# Altium PCB MGMEZZ02.PCBDOC (part 2 of 5)
Units mil, origin at the board's own origin, x right, y up, seen from the top; angles counter-clockwise.
Board outline 5705.83 x 3625.73 mil, 6 copper layers (Top Layer, Internal Plane 1, Mid-Layer 1, Mid-Layer 2, Internal Plane 2, Bottom Layer); 570 components, 354 nets, 2192 pads, 728 vias.
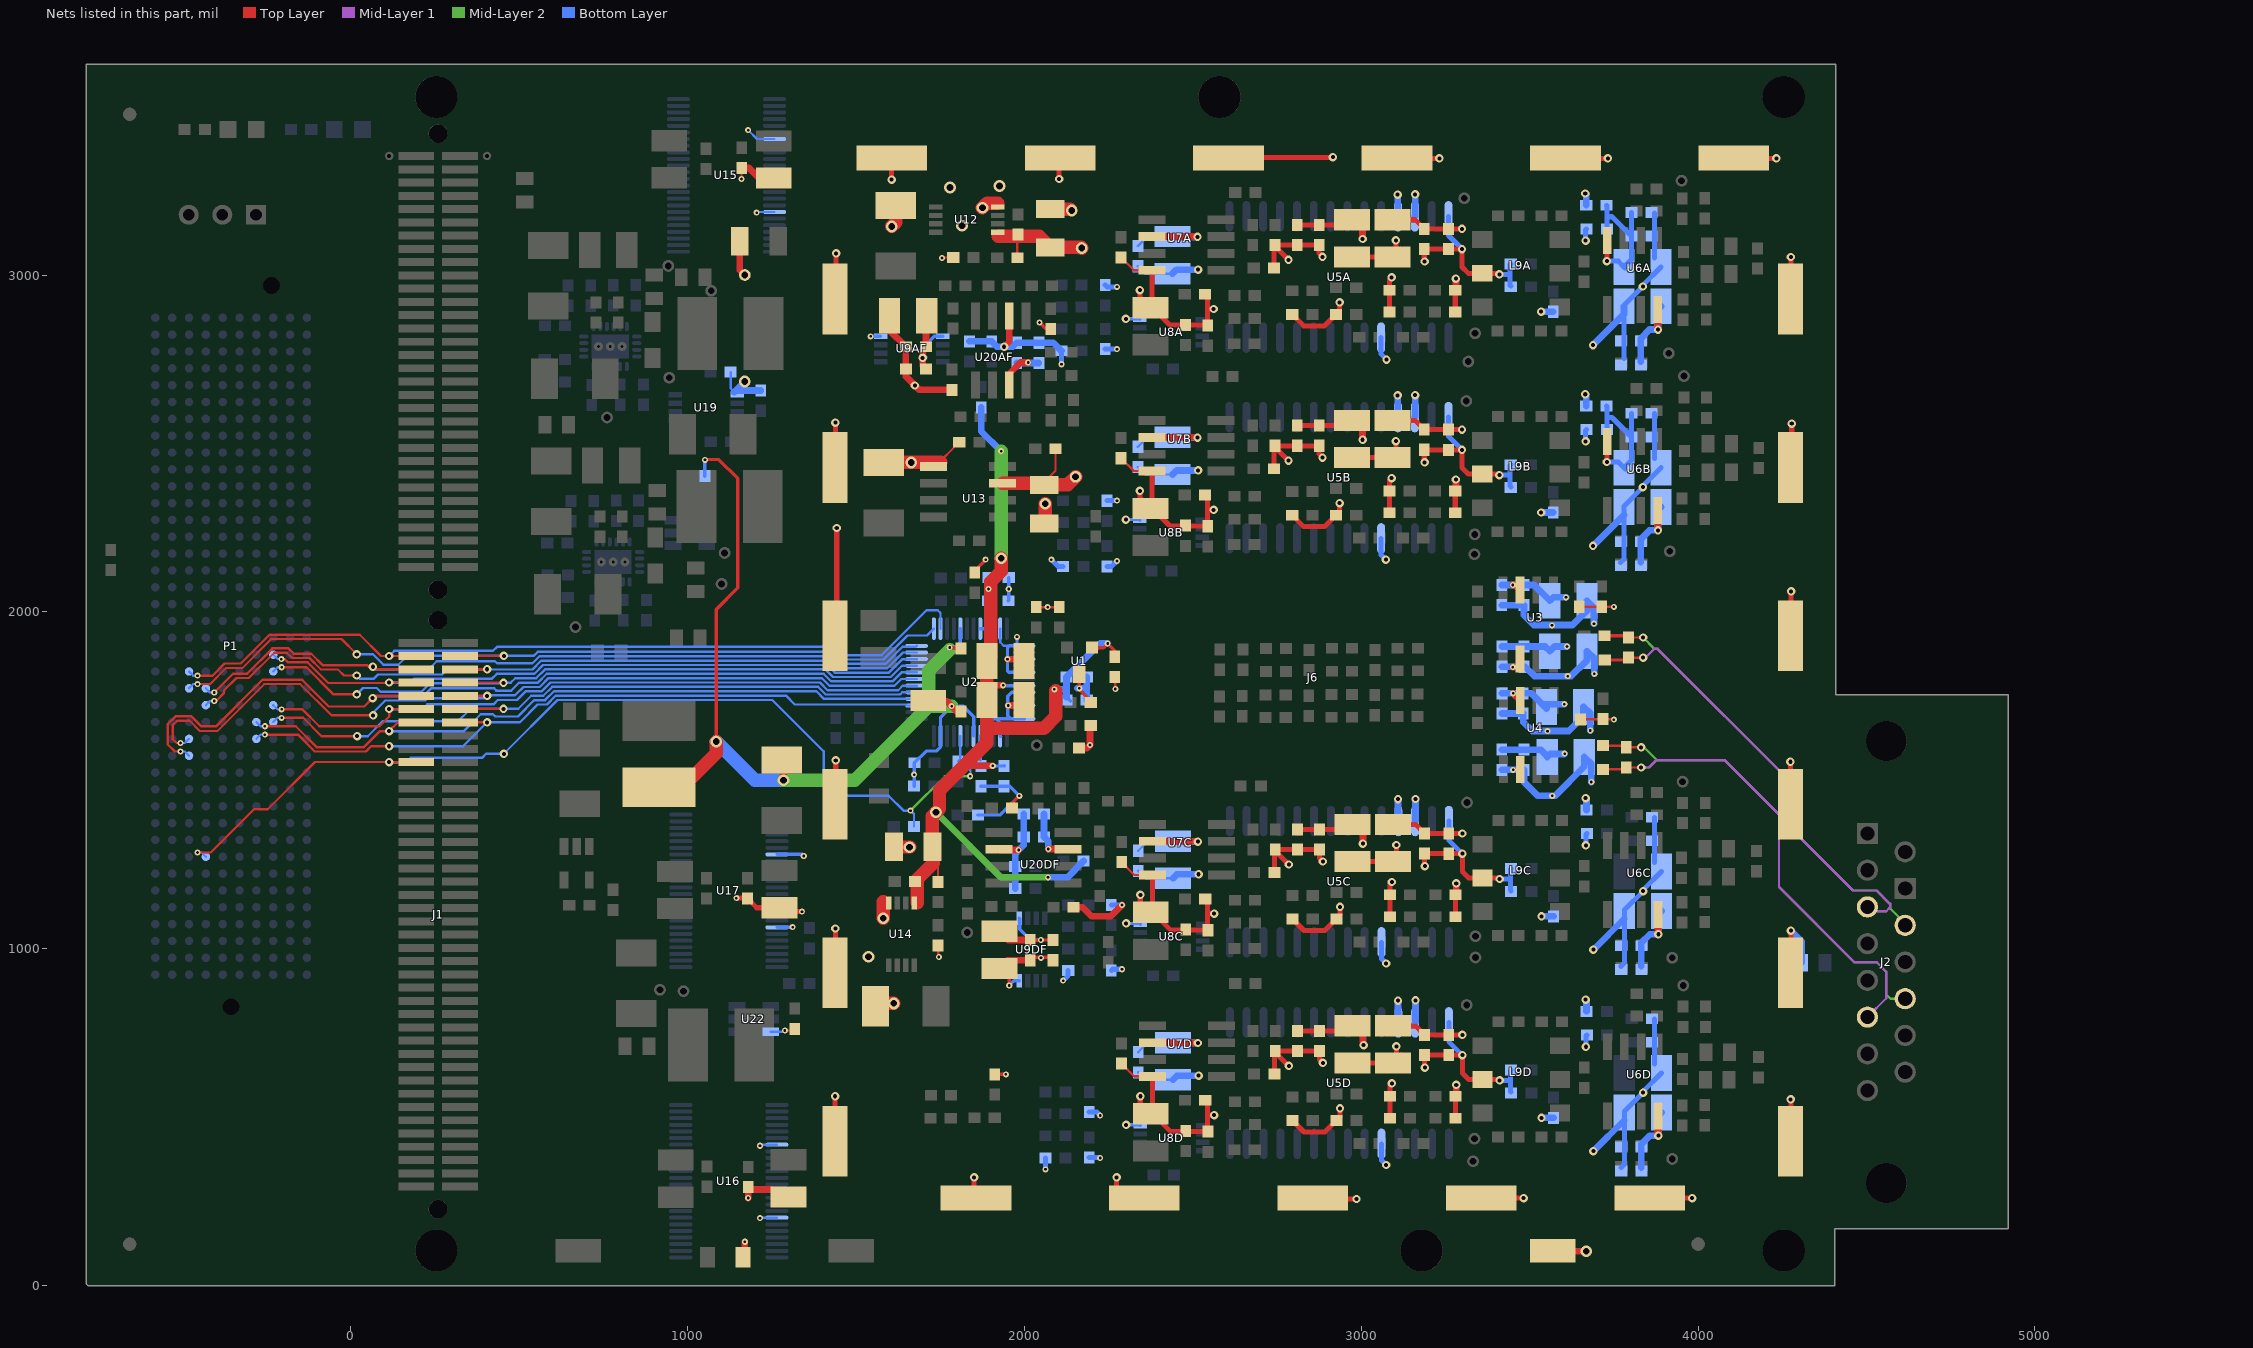
[diagram p6: the nets of this part, all layers, seen from the top]

## Footprints (in the part's own frame and the unit in brackets; to place one, negate y for a bottom-side part, rotate by r counter-clockwise, add the part's x,y. Pads: shape width x height; smd on the part's side, far side on the other; paste and mask are expansions set on the pad) (continued)
CON_AMP_1MM_64PINS [mil]
  rect 23.6x106.3 smd: 1(-0.4,0.18) 2(-0.4,-129.73) 3(-39.77,0.18) 4(-39.77,-129.73) 5(-79.13,0.18) 6(-79.13,-129.73) 7(-118.5,0.18) 8(-118.5,-129.73) 9(-157.87,0.18) 10(-157.87,-129.73) 11(-197.23,0.18) 12(-197.23,-129.73) 13(-236.6,0.18) 14(-236.6,-129.73) 15(-275.97,0.18) 16(-275.97,-129.73) 17(-315.33,0.18) 18(-315.33,-129.73) 19(-354.7,0.18) 20(-354.7,-129.73) 21(-394.07,0.18) 22(-394.07,-129.73) 23(-433.43,0.18) 24(-433.43,-129.73) 25(-472.8,0.18) 26(-472.8,-129.73) 27(-512.17,0.18) 28(-512.17,-129.73) 29(-551.53,0.18) 30(-551.53,-129.73) 31(-590.9,0.18) 32(-590.9,-129.73) 33(-630.27,0.18) 34(-630.27,-129.73) 35(-669.63,0.18) 36(-669.63,-129.73) 37(-709,0.18) 38(-709,-129.73) 39(-748.37,0.18) 40(-748.37,-129.73) 41(-787.73,0.18) 42(-787.73,-129.73) 43(-827.1,0.18) 44(-827.1,-129.73) 45(-866.47,0.18) 46(-866.47,-129.73) 47(-905.83,0.18) 48(-905.83,-129.73) 49(-945.2,0.18) 50(-945.2,-129.73) 51(-984.57,0.18) 52(-984.57,-129.73) 53(-1023.93,0.18) 54(-1023.93,-129.73) 55(-1063.3,0.18) 56(-1063.3,-129.73) 57(-1102.67,0.18) 58(-1102.67,-129.73) 59(-1142.03,0.18) 60(-1142.03,-129.73) 61(-1181.4,0.18) 62(-1181.4,-129.73) 63(-1220.77,0.18) 64(-1220.77,-129.73)
  round 56 hole 55 unplated: HOLE1(-1287.8,-64.72) HOLE2(66.52,-64.77)
  silkscreen extent -1320,-198 98,71
CON_AMP_1MM_84PINS [mil]
  rect 23.6x106.3 smd: 1(-0.4,0.12) 2(-0.4,-129.8) 3(-39.77,0.12) 4(-39.77,-129.8) 5(-79.13,0.12) 6(-79.13,-129.8) 7(-118.5,0.12) 8(-118.5,-129.8) 9(-157.87,0.12) 10(-157.87,-129.8) 11(-197.23,0.12) 12(-197.23,-129.8) 13(-236.6,0.12) 14(-236.6,-129.8) 15(-275.97,0.12) 16(-275.97,-129.8) 17(-315.33,0.12) 18(-315.33,-129.8) 19(-354.7,0.12) 20(-354.7,-129.8) 21(-394.07,0.12) 22(-394.07,-129.8) 23(-433.43,0.12) 24(-433.43,-129.8) 25(-472.8,0.12) 26(-472.8,-129.8) 27(-512.17,0.12) 28(-512.17,-129.8) 29(-551.53,0.12) 30(-551.53,-129.8) 31(-590.9,0.12) 32(-590.9,-129.8) 33(-630.27,0.12) 34(-630.27,-129.8) 35(-669.63,0.12) 36(-669.63,-129.8) 37(-709,0.12) 38(-709,-129.8) 39(-748.37,0.12) 40(-748.37,-129.8) 41(-787.73,0.12) 42(-787.73,-129.8) 43(-827.1,0.12) 44(-827.1,-129.8) 45(-866.47,0.12) 46(-866.47,-129.8) 47(-905.83,0.12) 48(-905.83,-129.8) 49(-945.2,0.12) 50(-945.2,-129.8) 51(-984.57,0.12) 52(-984.57,-129.8) 53(-1023.93,0.12) 54(-1023.93,-129.8) 55(-1063.3,0.12) 56(-1063.3,-129.8) 57(-1102.67,0.12) 58(-1102.67,-129.8) 59(-1142.03,0.12) 60(-1142.03,-129.8) 61(-1181.4,0.12) 62(-1181.4,-129.8) 63(-1220.77,0.12) 64(-1220.77,-129.8) 65(-1260.13,0.12) 66(-1260.13,-129.8) 67(-1299.5,0.12) 68(-1299.5,-129.8) 69(-1338.87,0.12) 70(-1338.87,-129.8) 71(-1378.23,0.12) 72(-1378.23,-129.8) 73(-1417.6,0.12) 74(-1417.6,-129.8) 75(-1456.97,0.12) 76(-1456.97,-129.8) 77(-1496.33,0.12) 78(-1496.33,-129.8) 79(-1535.7,0.12) 80(-1535.7,-129.8) 81(-1575.07,0.12) 82(-1575.07,-129.8) 83(-1614.43,0.12) 84(-1614.43,-129.8)
  round 56 hole 55 unplated: HOLE1(-1681.5,-64.83) HOLE2(66.52,-64.83)
  silkscreen extent -1711,-199 98,71
DSUB/RS.318/TM/15 [mil]
  rect 63x63 hole 42: 1(0.47,0.25) 10(163.97,112.25)
  round 63 hole 42: 2(109.47,0.25) 3(218.47,0.25) 4(327.47,0.25) 5(436.47,0.25) 6(545.47,0.25) 7(654.47,0.25) 8(763.47,0.25) 9(54.97,112.25) 11(272.97,112.25) 12(381.97,112.25) 13(490.97,112.25) 14(599.97,112.25) 15(708.97,112.25)
  round 120 hole 120: Hole29(1037.97,56.25) Hole30(-274.03,56.25)
  silkscreen extent -406,-75 1169,662
Fiducial_mark [mil]
  round 40 smd paste-20 mask+20: 0(0,0)
  round 40 smd far side paste-20 mask+20: 1(0,0)
GroundClip [mil] "GroundClipPoint"
  rect 135x70 smd: 1(0,0)
  silkscreen extent -75,-42 75,43, body extent -68,-35 68,35, height 60
HDR1X3_MolexVertical [mm]
  rect 1.5x1.5 hole 0.889: 1(0,0)
  round 1.5 hole 0.889: 2(2.54,0) 3(5.08,0)
  silkscreen extent -2.54,-3.02 7.62,1.73
IHLP-1212 [mm] "Inductor"
  rect 1.5x1.2 smd: 1(-1.35,0) 2(1.35,0)
  round 0.2 on Top Overlay: 2(-2.032,0.889)
  silkscreen extent -1.8,-1.6 1.8,1.6, body extent -1.91,-1.65 1.91,1.65, height 2
LTC3626 [mm] "QFN, 20-Leads, Body 4.1x3.1mm (max), Pitch 0.50mm, IPC Medium Density"
  oval 0.7x0.3 smd: 1(-1.5,1.25) 2(-1.5,0.75) 3(-1.5,0.25) 4(-1.5,-0.25) 5(-1.5,-0.75) 6(-1.5,-1.25) 11(1.5,-1.25) 12(1.5,-0.75) 13(1.5,-0.25) 14(1.5,0.25) 15(1.5,0.75) 16(1.5,1.25)
  oval 0.3x0.7 smd: 7(-0.75,-2) 8(-0.25,-2) 9(0.25,-2) 10(0.75,-2) 17(0.75,2) 18(0.25,2) 19(-0.25,2) 20(-0.75,2)
  round 0.66 hole 0.203: 21(0,0) 21(0,-0.889) 21(0,0.889)
  rect 1.8x2.8 smd: 21(0,0)
  silkscreen extent -1.83,-2.05 1.55,2.05, body extent -1.55,-2.05 1.55,2.05, height 0.8
MSOP-8 [mil]
  rect 40x16 smd: 1(0,0) 2(0,-25) 3(0,-50) 4(0,-75) 5(185,-75) 6(185,-50) 7(185,-25) 8(185,0)
  silkscreen extent -3,-100 150,26
MTHOLE.125 [mil]
  round 125 hole 125 unplated: 1(-0.4,-0.25)
PWB [mil] "Transformer - Coilcraft"
  round 10 on Top Overlay: 1(-44,-3)
  rect 50x60 smd: 1(0,0) 2(100,0) 3(200,0) 4(200,230) 5(100,230) 6(0,230)
  silkscreen extent -35,-35 235,267
"SHIELD 2.75X3.00" [mil]
  rect 210x75 smd: 1(380.2,37) 2(880.2,37) 3(1380.2,37) 4(1880.2,37) 5(2380.2,37) 6(2880.2,37) 12(2880.2,-2800) 13(2380.2,-2800) 14(1880.2,-2800) 15(1380.2,-2800) 16(880.2,-2800) 17(380.2,-2800)
  rect 75x210 smd: 7(3048.7,-381.5) 8(3048.7,-881.5) 9(3048.7,-1381.5) 10(3048.7,-1881.5) 11(3048.7,-2381.5) 18(-38.3,-2631.5) 19(-38.3,-2131.5) 20(-38.3,-1631.5) 21(-38.3,-1131.5) 22(-38.3,-631.5) 23(-38.3,-131.5)
SO8 [mil]
  round 10 on Top Overlay: 0(-40,40)
  rect 80x26 smd: 1(0,0) 2(0,-50) 3(0,-100) 4(0,-150) 5(205,-150) 6(205,-100) 7(205,-50) 8(205,0)
  silkscreen extent -53,-180 258,30
"SOIC 28 300mils" [mm] "SOIC, 28-Leads, Body 18.1x7.6mm (max), Pitch 1.27mm, IPC Medium Density"
  oval 2.3x0.6 smd: 1(-4.575,8.255) 2(-4.575,6.985) 3(-4.575,5.715) 4(-4.575,4.445) 5(-4.575,3.175) 6(-4.575,1.905) 7(-4.575,0.635) 8(-4.575,-0.635) 9(-4.575,-1.905) 10(-4.575,-3.175) 11(-4.575,-4.445) 12(-4.575,-5.715) 13(-4.575,-6.985) 14(-4.575,-8.255) 15(4.575,-8.255) 16(4.575,-6.985) 17(4.575,-5.715) 18(4.575,-4.445) 19(4.575,-3.175) 20(4.575,-1.905) 21(4.575,-0.635) 22(4.575,0.635) 23(4.575,1.905) 24(4.575,3.175) 25(4.575,4.445) 26(4.575,5.715) 27(4.575,6.985) 28(4.575,8.255)
  silkscreen extent -4.7,-9.05 3.03,9.23, body extent -3.8,-9.05 3.8,9.05, height 2.65
SOT23 [mil]
  rect 36x36 smd: 1(-38,-80) 2(37,-80)
  rect 36x50 smd: 3(0,0)
  silkscreen extent -58,-85 57,5
SOT23-5 [mil]
  rect 26x50 smd: 1(-37.5,0) 2(0,0) 3(37.5,0) 4(37.5,100) 5(-37.5,100)
  silkscreen extent -83,-8 65,100
SOT23-6 [mil]
  rect 26x50 smd: 1(-37.5,0) 2(0,0) 3(37.5,0) 4(37.5,100) 5(0,100) 6(-37.5,100)
  silkscreen extent -83,-8 65,100
TANT4532 [mil]
  rect 80x120 smd: 1(-0.4,0.12) 2(179.6,0.12)
  silkscreen extent -83,-67 228,102
TCASE-A [mm]
  rect 1.35x2.15 smd: 1(0,0) 2(2.9,0)
  silkscreen extent -1.61,-1.4 4.49,1.4
TP-3520-SK [mil]
  round 35 hole 20: 1(0,0)
  silkscreen extent -27,-27 28,27
TSQFP50P900X900X160-48N [mm] "TSQFP, 48-Leads, Body 9.1x9.1mm (max), Pitch 0.50mm, IPC Medium Density"
  oval 1.7x0.3 smd: 1(-4.05,2.75) 2(-4.05,2.25) 3(-4.05,1.75) 4(-4.05,1.25) 5(-4.05,0.75) 6(-4.05,0.25) 7(-4.05,-0.25) 8(-4.05,-0.75) 9(-4.05,-1.25) 10(-4.05,-1.75) 11(-4.05,-2.25) 12(-4.05,-2.75) 25(4.05,-2.75) 26(4.05,-2.25) 27(4.05,-1.75) 28(4.05,-1.25) 29(4.05,-0.75) 30(4.05,-0.25) 31(4.05,0.25) 32(4.05,0.75) 33(4.05,1.25) 34(4.05,1.75) 35(4.05,2.25) 36(4.05,2.75)
  oval 0.3x1.7 smd: 13(-2.75,-4.05) 14(-2.25,-4.05) 15(-1.75,-4.05) 16(-1.25,-4.05) 17(-0.75,-4.05) 18(-0.25,-4.05) 19(0.25,-4.05) 20(0.75,-4.05) 21(1.25,-4.05) 22(1.75,-4.05) 23(2.25,-4.05) 24(2.75,-4.05) 37(2.75,4.05) 38(2.25,4.05) 39(1.75,4.05) 40(1.25,4.05) 41(0.75,4.05) 42(0.25,4.05) 43(-0.25,4.05) 44(-0.75,4.05) 45(-1.25,4.05) 46(-1.75,4.05) 47(-2.25,4.05) 48(-2.75,4.05)
  silkscreen extent -4.18,-2.8 2.8,3.57, body extent -3.5,-3.5 3.5,3.5, height 1.6
TSSOP48-0.5mmpitch [mm] "TSSOP48-0.5mmpitch"
  oval 1.75x0.3 smd: 1(-3.625,5.75) 2(-3.625,5.25) 3(-3.625,4.75) 4(-3.625,4.25) 5(-3.625,3.75) 6(-3.625,3.25) 7(-3.625,2.75) 8(-3.625,2.25) 9(-3.625,1.75) 10(-3.625,1.25) 11(-3.625,0.75) 12(-3.625,0.25) 13(-3.625,-0.25) 14(-3.625,-0.75) 15(-3.625,-1.25) 16(-3.625,-1.75) 17(-3.625,-2.25) 18(-3.625,-2.75) 19(-3.625,-3.25) 20(-3.625,-3.75) 21(-3.625,-4.25) 22(-3.625,-4.75) 23(-3.625,-5.25) 24(-3.625,-5.75) 25(3.625,-5.75) 26(3.625,-5.25) 27(3.625,-4.75) 28(3.625,-4.25) 29(3.625,-3.75) 30(3.625,-3.25) 31(3.625,-2.75) 32(3.625,-2.25) 33(3.625,-1.75) 34(3.625,-1.25) 35(3.625,-0.75) 36(3.625,-0.25) 37(3.625,0.25) 38(3.625,0.75) 39(3.625,1.25) 40(3.625,1.75) 41(3.625,2.25) 42(3.625,2.75) 43(3.625,3.25) 44(3.625,3.75) 45(3.625,4.25) 46(3.625,4.75) 47(3.625,5.25) 48(3.625,5.75)
  silkscreen extent -3.75,-6.3 2.35,6.57, body extent -3.1,-6.3 3.1,6.3, height 1.2

## Part data
+2.5VA +2.5VD +5VA +5VD -5VA AmpNA AmpNB AmpNC AmpND AmpPA AmpPB AmpPC AmpPD BuckSync CModeA CModeB CModeC CModeD In5V5n In5V5p IoutAA IoutAB IoutAC IoutAD IoutBA IoutBB IoutBC IoutBD Ip3V7n Ip3V7p Ip5V5n Ip5V5p SlowDacDF TMON1 TMON2 VRef: "TestPoint1"
C1 C2 C11 C12 C25A C25B C25C C25D C32 C33 C34 C44 C49 C51 C60A C60B C60C C60D C61A C61B C61C C61D C67A C67B C67C C67D C71A C71B C71C C71D C78A C78B C78C C78D C90AF C90DF C114 C116 C118 C120 C122 C124: library part "CAP 1210", "Capacitor, Ceramic, 1210"
C3 C4 C5 C6 C7 C8 C9 C10 C13 C14 C15 C16 C17 C18 C19 C20 C21 C22 C23 C24 C26 C27 C28 C29 C30 C31A C31B C31C C31D C35 C36 C37 C38 C39 C40 C41 C42 C43 C45 C46 C47 C48A C48B C48C C48D C50 C52 C53 C54 C57 C58 C59 C62A C62B C62C C62D C63A C63B C63C C63D C64A C64B C64C C64D C65A C65B C65C C65D C66A C66B C66C C66D C68 C69A C69B C69C C69D C70A C70B C70C C70D C72A C72B C72C C72D C73A C73B C73C C73D C74A C74B C74C C74D C75A C75B C75C C75D C76A C76B C76C C76D C77A C77B C77C C77D C79A C79B C79C C79D C80A C80B C80C C80D C81A C81B C81C C81D C82 C83A C83B C83C C83D C84A C84B C84C C84D C85A C85B C85C C85D C86A C86B C86C C86D C87A C87B C87C C87D C88AF C88DF C89AF C89DF C91AF C91DF C92AF C92DF C93 C94 C95 C103 C105A C105B C105C C105D C109 C112A C112B C112C C112D C113AF C113DF C115 C117 C119 C121 C123 C125 C126AF C126DF C127 C128AF C128DF C129AF C129DF C130: library part "CAP 0603", "Capacitor, Ceramic, 0603"
C55 C56 C96 C97 C98 C100 C101 C104 C107 C108 C111: library part CAP4532, "33u, 16V, 20%, 4532C, X5R"
C99 C102 C106 C110: library part "CAP TANT CASE-A", "TantA Cap"
DP1 DP2: library part "LED, yellow, 0805, 2mA", "LED"
J1: library part "IEEE1386 Amp120527-2 Plug84pin"
J4: library part "Header 3", "Header, 0.1\"  3-Pin"
J5 J7 J8: "Ground Clip point"
J6: library part MezzShield
L1 L2 L3 L4 L5 L6 L7 L8: library part "IND 0603", "Inductor 0603"
L9A L9B L9C L9D: library part PWB-1-CLB, "Transformer"
L10 L11 L12 L13: library part INDPM54, "Inductor PM54"
L14 L17 L18A L18B L18C L18D L19A L19B L19C L19D: library part "IND 0805", "Inductor 0805"
L15 L16: library part "IND IHLP1212", "Inductor IHLP1212"
MH1 MH2 MH3 MH4 MH5 MH6: library part MTHOLE
P1: "Samtec ASP-134602-01"
R1 R2 R3 R4 R5 R6 R7 R8 R9 R10 R11 R12 R13 R14 R15 R16 R17 R18 R19A R19B R19C R19D R20A R20B R20C R20D R21A R21B R21C R21D R22AF R22DF R23A R23B R23C R23D R24A R24B R24C R24D R25A R25B R25C R25D R26A R26B R26C R26D R27 R28 R29A R29B R29C R29D R30A R30B R30C R30D R31A R31B R31C R31D R32AF R32DF R33 R34 R35 R36 R37 R38 R39 R40 R41 R42 R47 R48 R49A R49B R49C R49D R50A R50B R50C R50D R51A R51B R51C R51D R52A R52B R52C R52D R53A R53B R53C R53D R54A R54B R54C R54D R55A R55B R55C R55D R56A R56B R56C R56D R57A R57B R57C R57D R60 R61 R62 R63 R64 R65 R66 R67 R68 R69 R70 R71 R72 R73 R74 R75 R76A R76B R76C R76D R77A R77B R77C R77D R82A R82B R82C R82D R83A R83B R83C R83D R84A R84B R84C R84D R85 R86 R87A R87B R87C R87D R88A R88B R88C R88D R89A R89B R89C R89D R90A R90B R90C R90D R91A R91B R91C R91D R92A R92B R92C R92D R93AF R93DF R94AF R94DF R95AF R95DF R96AF R96DF R97AF R97DF R98AF R98DF R99AF R99DF R100AF R100DF R101 R102 R103 R104A R104B R104C R104D R105AF R105DF R106 R107 R108A R108B R108C R108D R110AF R110DF: library part "RES 0603", "Resistor"
R43 R44 R45 R46: library part "RES 0805", "RES 0.1 OHM 1/8W 0805 SMD"
R58 R59 R78 R79 R109: library part "RES 0805", "RES 0.0 OHM 1/8W 0805 SMD"
R80 R81: library part "RES 1206", "RES 0.0 OHM 1/8W 1206 SMD"
U1: library part REF3312AIDBZT, "Vref 1.25V , +-0.15%, 5mA Output, SOT-23-3"
U2: "ADC 2-Channel 12bit"
U3 U4 U20AF U20DF: "IC AMP DIFF LDIST LP 95MA 8SOIC"
U5A U5B U5C U5D: "DAC 16bit 30MSPS"
U6A U6B U6C U6D: "Dual Opamp 200Mhz GBP Soic 8"
U7A U7B U7C U7D: "Voltage Referance"
U8A U8B U8C U8D U9AF U9DF: library part DAC121S101CIMM/NOPB, "CONV D/A 12BIT MICROPWR 8MSOP"
U10 U11: "20V, 2.5A Sync buck, 3Mhz"
U12 U14 U19: "REG, micropower, low noise, low  dropout"
U13: "REG, negative micropower low dropout"
U18: "Comparator 2.7V to 44V rail to rail"
U21: "Single  NON-INVERTING BUFFER, Open Drain"
U22: library part ADT7301, "Digital Temperature Sensor, 13-Bit, +/-1 Degree Accurate"

## Free pads (board coordinates)
  round 25 hole 12: 1(114.33,3353.43) 1(404.85,3353.43)

## Via types
v1: diameter 25, hole 12, Top Layer to Bottom Layer, 292 vias
v2: diameter 18, hole 8, Top Layer to Bottom Layer, 225 vias
v3: diameter 25, hole 15, Top Layer to Bottom Layer, tented both sides, 91 vias
v4: diameter 18, hole 8, Top Layer to Bottom Layer, tented both sides, 61 vias
v5: diameter 35, hole 20, Top Layer to Bottom Layer, 58 vias
v6: diameter 40, hole 20, Top Layer to Bottom Layer, 1 vias

## Nets (pads, with @x,y where several pads share a name; then routed paths per layer and width w, separated by ;. In a path a pad name is that pad's centre, name@x,y a point inside that pad or via, vN(x,y) a via of type N, cw(c..) or ccw(c..) an arc to the next point about the centre after c; other vN are vias at no path point)
+2.5VA: +2.5VA.1 C10.2 C33.2 C35.2 C36.2 C37.2 C41.2 C44.2 C45.2 C47.2 C103.2 C106.1 R41.1 R110AF.1 R110DF.1 U1.1 U2.7 U2.17 U2.44 U2.45 U14.1 | length 3369.9
  Top Layer w7: C106.1@1729.75,1296.44 C106.1@1735.29,1301.98 ; C106.1@1735.29,1259.69 1743.34,1251.64 R41.1@1743.34,1198.41
  Top Layer w10: U1.1@2201,1894 2235,1894 v2(2247,1906) 2268.18,1884.82 C10.2@2268.18,1866.76
  Top Layer w20: 1816.5,1539 1820.5,1543 v2(1906,1543) ; C44.2@1897,1782 v2(1937,1782)
  Top Layer w40: 1681.51,1135.74 1681.51,1205.91 1729.75,1254.15 C106.1@1729.75,1296.44 ; C106.1@1726,1311.27 1726,1393.58 +2.5VA.1@1737.44,1405.02 1748,1415.58 1748,1470.5 1816.5,1539 ; 1820.5,1543 1888.88,1611.38 1888.88,1650 ; v5(1931,2159) 1931,2120.59 1900,2089.59 1900,1865.12 C33.2@1888.88,1854 C44.2@1888.88,1738 1888.88,1650 ; v2@2093,1765.25 2093,1690 2057,1654 1892.88,1654 1888.88,1650
  Mid-Layer 2 w20: +2.5VA.1@1737.44,1405.02 1930.45,1212 v2(2070,1212)
  Mid-Layer 2 w40: v5(1931,2159) v2(1931,2477)
  Bottom Layer w10: C45.2@1869.11,1560.25 U2.17@1869.11,1631.33 ; U2.44@1869.11,1950.23 U2.45@1888.8,1950.23 1888.8,2028.99 C37.2@1892.59,2032.78 1893.59,2033.78 v2(1893.59,2067.78) C41.2@1893.59,2101.78 ; C45.2@1870.78,1542.41 C35.2@1939.78,1542.41 C35.2@1940.25,1542.89 ; v2(1937,1782) 1938.06,1780.94 U2.7@1999.04,1780.94 ; 2123.22,1770 2125.22,1772 ; C36.2@2125.22,1746.78 C36.2@2137,1735
  Bottom Layer w20: R110AF.1@1872,2607 1872,2536 v2(1931,2477) ; v2(2070,1212) 2127.77,1212 R110DF.1@2176,1260.23 ; v2(2089,1770) 2123.22,1770 ; C36.2@2125.22,1746.78 2125.22,1772 C47.2@2125.22,1806.4 2224.82,1906 v2(2247,1906)
+2.5VD: +2.5VD.1 C9.2 C19.2 C34.2 C42.2 C43.2 C108.1 L13.1 R71.2 U2.18 U2.23 U2.41 | length 2981.3
  Top Layer w7: C34.2@1714.35,1736.61 C34.2@1715.97,1735
  Top Layer w10: v2@1050.79,2452.21 1092.79,2452.21 1149,2396 1149,2071 1085,2007 +2.5VD.1@1085,1615 ; v2(1778,1894) 1809,1894 C9.2@1812,1891
  Top Layer w20: L13.1@914.88,1479.6 L13.1@984.6,1479.6 ; C108.1@1280.12,1560.4 1285,1555.52 v5(1285,1500) ; C34.2@1715.97,1735 1769,1735 v2(1784,1720) 1800,1704 C19.2@1812,1704
  Top Layer w40: L13.1@984.6,1479.6 1085,1580 +2.5VD.1@1085,1615
  Mid-Layer 2 w40: v5(1285,1500) 1496,1500 1716,1720 ; v2@1778,1887.25 1716,1825.25 1716,1720 ; v2(1784,1720) 1716,1720
  Bottom Layer w10: v2@1050,2453 v2(1051.59,2451.41) R71.2@1051.59,2402.87 ; C42.2@1672.59,1482.78 v2(1672.59,1516.78) 1672.59,1550.78 C43.2@1673.59,1551.78 1708.67,1586.87 1738.32,1586.87 1751,1599.55 U2.23@1751,1631.33 1751,1687 v2(1784,1720) 1818,1720 1849.43,1688.57 U2.18@1849.43,1631.33 ; v2(1778,1894) 1794,1894 1810.06,1910.06 U2.41@1810.06,1950.23
  Bottom Layer w40: +2.5VD.1@1085,1615 1200,1500 v5(1285,1500)
+5VA: +5VA.1 C1.2 C2.2 C3.2 C4.2 C5.1 C6.1 C25A.1 C25B.1 C25C.1 C25D.1 C31A.1 C31B.1 C31C.1 C31D.1 C60A.2 C60B.2 C60C.2 C60D.2 C62A.2 C62B.2 C62C.2 C62D.2 C63A.2 C63B.2 C63C.2 C63D.2 C71A.2 C71B.2 C71C.2 C71D.2 C72A.1 C72B.1 C72C.1 C72D.1 C81A.1 C81B.1 C81C.1 C81D.1 C90AF.2 C90DF.2 C91AF.2 C91DF.2 C92AF.2 C92DF.2 C109.2 C110.1 C128AF.2 C128DF.2 C129AF.1 C129DF.1 R20A.2 R20B.2 R20C.2 R20D.2 R27.1 U3.3 U4.3 U5A.25 U5B.25 U5C.25 U5D.25 U6A.8 U6B.8 U6C.8 U6D.8 U7A.2 U7B.2 U7C.2 U7D.2 U9AF.1 U9DF.1 U12.1 U20AF.3 U20DF.3 | length 5264.7
  Top Layer w7: R27.1@1979.25,3051.3 1979.25,3114.89 1979.25,3117.83 C109.2@1981.42,3120.01
  Top Layer w10: C92DF.2@2017.66,1025.67 v2@2048.67,1025.67 ; v2(2049,1026) C91DF.2@2084.32,1026
  Top Layer w15: C62B.2@2810,2553 C63B.2@2875,2553 2928,2553 C60B.2@2952,2577 ; C62A.2@2810,3149 C63A.2@2875,3149 2928,3149 C60A.2@2952,3173 ; C62D.2@2811,756 C63D.2@2876,756 2929,756 C60D.2@2953,780 ; C62C.2@2811,1354 C63C.2@2876,1354 2929,1354 C60C.2@2953,1378
  Top Layer w20: C91AF.2@1708,2721 1698,2731 v1(1698,2754) 1698,2777 C92AF.2@1708,2787 1708,2876.88 C90AF.2@1710.12,2879 ; C90DF.2@1924.87,1051 C90DF.2@1925.66,1051.79 1951.77,1025.67 C92DF.2@2017.66,1025.67 ; U20AF.3@1955,2673 1955,2707 1988,2740 v2(2011,2740) ; v2(2071,1296) 2129,1296 U20DF.3@2130,1295 ; U7B.2@2379,2518 2512.88,2518 v1(2513.88,2517) ; U7A.2@2379,3114 2512.88,3114 v1(2513.88,3113) ; U7D.2@2380,721 2513.88,721 v1(2514.88,720) ; U7C.2@2380,1319 2513.88,1319 v1(2514.88,1318) ; C60B.2@3003,2567 3003,2538.12 3004,2537.12 v1(3004,2511) ; C60A.2@3003,3163 3003,3134.12 3004,3133.12 v1(3004,3107) ; C60D.2@3004,770 3004,741.12 3005,740.12 3005,714 v1(3007,714) ; C60C.2@3004,1368 3004,1339.12 3005,1338.12 v1(3005,1312) ; v2(3450,2080) 3456,2080 U3.3@3471,2065 ; v2(3451,1758) U4.3@3472,1737 ; U6B.8@3880,2301 3880,2243 v1(3881,2242) ; U6A.8@3880,2897 3880,2839 v1(3881,2838) ; U6D.8@3881,504 3881,446 v1(3882,445) ; U6C.8@3881,1102 3881,1044 v1(3882,1043)
  Top Layer w40: 1923.08,3114.89 1979.25,3114.89 2043.83,3114.89 C110.1@2077.01,3081.71 2168.14,3081.71 +5VA.1@2169.94,3079.91
  Bottom Layer w7: C31B.1@2337,2490 2365.12,2518.12 C25B.1@2440,2518.12 ; C31A.1@2337,3086 2365.12,3114.12 C25A.1@2440,3114.12 ; C31D.1@2338,693 2366.12,721.12 C25D.1@2441,721.12 ; C31C.1@2338,1291 2366.12,1319.12 C25C.1@2441,1319.12
  Bottom Layer w10: v1@1708,2754 1699,2763 1699,2785 1732,2818 U9AF.1@1758,2818 ; U9DF.1@1985,1090 1986,1089 1986,1058 2018,1026 v2(2049,1026)
  Bottom Layer w20: C129AF.1@1977,2739 C128AF.2@2043,2739 ; C128DF.2@2058,1400 C129DF.1@2058,1332 2071,1319 v2(2071,1296) ; C25B.1@2450,2517 v1(2513.88,2517) ; C25A.1@2450,3113 v1(2513.88,3113) ; C25D.1@2451,720 v1(2514.88,720) ; C25C.1@2451,1318 v1(2514.88,1318) ; v1(3108,2642.88) 3108,2579.12 U5B.25@3109,2578.12 ; v1(3108,3238.88) 3108,3175.12 U5A.25@3109,3174.12 ; v1(3109,845.88) 3109,782.12 U5D.25@3110,781.12 ; v1(3109,1443.88) 3109,1380.12 U5C.25@3110,1379.12 ; C6.1@3417,2080 v2(3450,2080) C3.2@3483,2080 3512.88,2080 C1.2@3559.88,2033 3569.88,2043 v2(3608,2043) ; C5.1@3418,1758 C4.2@3481,1758 3504.88,1758 C2.2@3549.88,1713 ; v1(3534,2295) R20B.2@3570,2295 ; v1(3534,2891) R20A.2@3570,2891 ; v1(3535,498) R20D.2@3571,498 ; v1(3535,1096) R20C.2@3571,1096 ; C2.2@3549.88,1718 3541.88,1726 v2(3603,1726) ; C81B.1@3830,2147 3830,2216 3856,2242 v1(3881,2242) 3881,2301.88 C71B.2@3890.12,2311 ; C81A.1@3830,2743 3830,2812 3856,2838 v1(3881,2838) 3881,2897.88 C71A.2@3890.12,2907 ; C81D.1@3831,350 3831,419 3857,445 v1(3882,445) 3882,504.88 C71D.2@3891.12,514 ; C81C.1@3831,948 3831,1017 3857,1043 v1(3882,1043) 3882,1102.88 C71C.2@3891.12,1112
+5VD: +5VD.1 C82.2 C99.1 C116.1 C117.1 C120.1 C121.1 C124.1 C125.1 C130.1 R85.1 U15.7 U15.18 U16.7 U16.18 U17.7 U17.18 U19.1 U22.3 | length 1232.1
  Top Layer w7: v2(1160,3285) 1160,3317.07 C117.1@1160.64,3317.71 ; v2(1289,757) C130.1@1313.49,757
  Top Layer w10: C130.1@1313.49,757 C130.1@1318.49,762
  Top Layer w15: v2(1145,1150) 1176.97,1150 C125.1@1177.81,1149.15 1205.31,1121.65 C124.1@1272.81,1121.65 ; C124.1@1284.47,1110 v2(1340,1110)
  Top Layer w20: C99.1@1155,3100 1155,3014.97 +5VD.1@1170,2999.97 ; C117.1@1160.64,3317.71 1182.29,3317.71 1212.29,3287.71 C116.1@1255.64,3287.71 ; v2(1180,260) 1179.96,260.04 C121.1@1179.96,292.38 1187.35,285 1250,285 1272.03,262.97 C120.1@1300.06,262.97
  Bottom Layer w7: R85.1@1128,2712 1128,2663 1138,2653 ; v2(1180,3430) 1206.3,3403.7 U15.7@1258.17,3403.7 ; v2(1205,3185) 1207.16,3187.16 U15.18@1258.17,3187.16 ; v2(1215,200) 1216.62,201.62 U16.18@1265.18,201.62 ; v2(1215,415) 1218.15,418.15 U16.7@1265.18,418.15 ; U22.3@1247,753.5 1280.5,753.5 v2@1284,757
  Bottom Layer w10: U17.18@1265.53,1063.38 1311.38,1063.38 v2(1312,1064) ; U17.7@1265.53,1279.92 1340.08,1279.92 v2(1345,1275)
  Bottom Layer w20: 1138,2653 1139,2653 1143,2657 ; v5(1170,2684) 1143,2657 ; C82.2@1217,2657 1143,2657
-5VA: -5VA.1 C11.2 C12.2 C13.2 C14.2 C15.1 C16.1 C61A.2 C61B.2 C61C.2 C61D.2 C64A.2 C64B.2 C64C.2 C64D.2 C65A.2 C65B.2 C65C.2 C65D.2 C76A.1 C76B.1 C76C.1 C76D.1 C79A.1 C79B.1 C79C.1 C79D.1 C102.2 R39.1 R50A.2 R50B.2 R50C.2 R50D.2 U3.6 U4.6 U5A.26 U5B.26 U5C.26 U5D.26 U13.3 | length 2897.3
  Top Layer w7: C102.2@2059.1,2377.04 2059.1,2385.9 2092.37,2419.17 R39.1@2092.37,2483.97
  Top Layer w10: v2(3451,1531) U4.6@3471,1531
  Top Layer w15: C61B.2@3093,2568.12 3160,2568.12 C64B.2@3187,2541.12 3187.12,2541 C65B.2@3259,2541 v1(3299,2541) ; C61A.2@3093,3164.12 3160,3164.12 C64A.2@3187,3137.12 3187.12,3137 C65A.2@3259,3137 v1(3299,3137) ; C61D.2@3094,771.12 3161,771.12 C64D.2@3188,744.12 3188.12,744 C65D.2@3260,744 v1(3300,744) ; C61C.2@3094,1369.12 3161,1369.12 C64C.2@3188,1342.12 3188.12,1342 C65C.2@3260,1342 v1(3300,1342) ; C79B.1@3279,2294 C76B.1@3279,2359 ; C79A.1@3279,2890 C76A.1@3279,2955 ; C79D.1@3280,497 C76D.1@3280,562 ; C79C.1@3280,1095 C76C.1@3280,1160
  Top Layer w20: C76B.1@3279,2359 3281,2361 v1(3281,2393) ; C76A.1@3279,2955 3281,2957 v1(3281,2989) ; C76D.1@3280,562 3282,564 v1(3282,596) ; C76C.1@3280,1160 3282,1162 v1(3282,1194) ; v2(3450,1836) U3.6@3471,1836
  Top Layer w40: U13.3@1935.24,2381.47 2054.68,2381.47 C102.2@2059.1,2377.04 2128.04,2377.04 -5VA.1@2152,2401
  Bottom Layer w20: U5B.26@3159,2578.12 3160,2579.12 v1(3160,2643.42) ; U5A.26@3159,3174.12 3160,3175.12 v1(3160,3239.42) ; U5D.26@3160,781.12 3161,782.12 v1(3161,846.42) ; U5C.26@3160,1379.12 3161,1380.12 v1(3161,1444.42) ; C16.1@3417,1531 C14.2@3483,1531 3483,1495 3524.12,1453.88 v2(3567,1453.88) 3574.88,1453.88 3662.12,1541.12 C12.2@3662.12,1569 3683,1548.12 v2(3683,1495) ; C15.1@3418,1837 C13.2@3483,1837 3486,1837 3514,1809 3623,1809 3670.12,1856.12 C11.2@3670.12,1883 3692,1861.12 v2(3692,1816) ; v1(3665,2646) 3668,2643 R50B.2@3668,2611 ; v1(3665,3242) 3668,3239 R50A.2@3668,3207 ; v1(3666,849) 3669,846 R50D.2@3669,814 ; v1(3666,1447) 3669,1444 R50C.2@3669,1412
  other v2: 3613,1809
ADCA_N: J2.11 R3.2 R4.2 | length 1339.5
  Top Layer w7: R4.2@3793,1924 v1(3837,1924)
  Top Layer w10: R3.2@3722,1929 3788,1929 R4.2@3793,1924
  Mid-Layer 2 w7: v1(3837,1924) 3871,1890 3880,1890 4280,1490 4280,1352.81 4460,1172.81 4529.25,1172.81 4570,1132.05 4570,1120 4614.75,1075.25 J2.11@4614.75,1069.53
ADCA_P: J2.3 R4.1 R6.2 | length 1342.5
  Top Layer w7: R4.1@3793,1864 v1(3837,1864)
  Top Layer w10: R6.2@3723,1857 3786,1857 R4.1@3793,1864
  Mid-Layer 1 w7: v1(3837,1864) 3844,1864 3870,1890 3879.59,1890 4280,1489.59 4280,1352.81 4460,1172.81 4530.19,1172.81 4570,1133 4570,1122.22 4558.75,1110.97 4515.81,1110.97 J2.3@4502.75,1124.03
ADCB_N: J2.13 R11.2 R12.2 | length 1366.5
  Top Layer w7: R11.2@3718,1603 R12.2@3782,1603 ; R12.2@3787,1598 v1(3831,1598)
  Mid-Layer 2 w7: v1(3831,1598) 3839.4,1598 3877.4,1560 4078.59,1560 4240,1398.59 4240,1183 4463.22,959.78 4530.22,959.78 4558.75,931.25 4558.75,864.28 4571.5,851.53 J2.13@4614.75,851.53
ADCB_P: J2.6 R12.1 R15.2 | length 1395.9
  Top Layer w7: R15.2@3719,1533 R12.1@3782,1533 ; R12.1@3781,1532 R12.1@3787,1538 v1(3831,1538)
  Mid-Layer 1 w7: v1(3831,1538) 3854.49,1538 3876.49,1560 4078.59,1560 4240,1398.59 4240,1184.05 4464.27,959.78 4530.22,959.78 4558.75,931.25 4558.75,853.03 J2.6@4502.75,797.03
ADCCLK: J1.19 P1.D8 R47.1 R107.2 U2.20 | length 3024.5
  Top Layer w6.5: v4(-454.98,1285.49) -415.49,1285.49 -286.98,1414 -246,1414 -105.93,1554.07 v1(114.33,1554.07)
  Top Layer w7: v1(114.33,1554.07) J1.19@194.63,1554.07
  Mid-Layer 2 w7: v2(1662,1410) 1764,1512 v2(1839,1512)
  Bottom Layer w6.5: v4(-454.98,1285.49) -442.48,1285.49 P1.D8@-429.98,1272.99 ; v2(1662,1410) 1672,1400 R107.2@1672,1363
  Bottom Layer w7: v1(114.33,1554.07) 166.13,1554.07 178.63,1566.57 389.63,1566.57 401.63,1578.57 v1(454.63,1578.57) 614.37,1738.3 1251.7,1738.3 1404,1586 1404,1485 1435,1454 1597,1454 1641,1410 v2(1662,1410) ; U2.20@1810.06,1631.33 1810.06,1562.94 R47.1@1803,1555.88 1813.12,1555.88 1840,1529 1840,1513 v2(1839,1512)
ADCDATA0: J1.3 P1.C19 U2.38 | length 2519
  Top Layer w7: v4(-454.98,1810.49) -410.54,1810.49 -374.5,1846.53 -326.17,1846.53 -240.68,1932.02 -169.28,1932 26.98,1932.02 90,1869 v1(114.33,1869) J1.3@194.63,1869
  Bottom Layer w6.5: P1.C19@-479.98,1822.99 -467.48,1810.49 v4(-454.98,1810.49)
  Bottom Layer w7: v1(114.33,1869) 129.63,1884.3 422.63,1884.3 434.3,1895.97 1434.62,1895.97 1459.02,1871.57 1576.57,1871.57 1709.78,2004.78 1742.59,2004.78 1751,1996.36 U2.38@1751,1950.23
ADCDATA1: J1.4 P1.C18 U2.37 | length 2496.9
  Top Layer w6.5: v4(-454.98,1785.49) -417.51,1785.49 -369.22,1833.78 -320.89,1833.78 -235.42,1919.25 -164,1919.25 ; -163.98,1919.27 -27.27,1919.27 v1(18,1874)
  Top Layer w7: J1.4@324.55,1869 453.33,1869 453.63,1869.3 v1(454.63,1869.3)
  Bottom Layer w6.5: P1.C18@-479.98,1772.99 -467.48,1785.49 v4(-454.98,1785.49)
  Bottom Layer w7: v1(18,1874) 66,1874 97,1843 141,1843 167.3,1869.3 v1(454.63,1869.3) 543.13,1869.3 555.13,1881.3 1430.9,1881.3 1453.63,1858.57 1581.95,1858.57 1653.38,1930 1711.09,1930 U2.37@1731.32,1950.23
ADCDATA2: J1.5 P1.D18 U2.36 | length 2374.4
  Top Layer w7: v4(-404.98,1760.49) -349,1816.46 -307.57,1816.46 -232.54,1891.49 -184.49,1891.49 -168.52,1875.52 -117.07,1875.52 -83.55,1842 49,1842 54,1837 v1(66,1837) ; v1@65.55,1828.87 66.32,1829.63 J1.5@194.63,1829.63
  Bottom Layer w6.5: P1.D18@-429.98,1772.99 -417.48,1760.49 v4(-404.98,1760.49)
  Bottom Layer w7: v1@66,1828.87 231.2,1828.87 255.63,1853.3 428.15,1853.3 434.15,1847.3 539.52,1847.3 560.52,1868.3 1425.52,1868.3 1448.25,1845.57 1587.34,1845.57 1638.27,1896.5 1677.59,1896.5 U2.36@1680.14,1899.05
ADCDATA3: J1.6 P1.D17 U2.35 | length 2343.6
  Top Layer w6.5: v4(-404.98,1735.49) -399.51,1735.49 -376,1759 -376,1767 -339.29,1803.71 -302.29,1803.71 -227.26,1878.74 -189.77,1878.74 -173.8,1862.77 -122.35,1862.77 -88.83,1829.25 -38.25,1829.25 -20,1811 v1(18,1811)
  Top Layer w7: J1.6@324.55,1829.63 v1(404.85,1829.63)
  Bottom Layer w6.5: P1.D17@-429.98,1722.99 -417.48,1735.49 v4(-404.98,1735.49)
  Bottom Layer w7: v1(18,1811) 28,1801 68,1801 81,1814 271,1814 286.63,1829.63 v1(404.85,1829.63) 405.48,1829 427.95,1829 539.6,1829 565.9,1855.3 1420.13,1855.3 1442.86,1832.57 1592.72,1832.57 1639.52,1879.36 U2.35@1680.14,1879.36
ADCDATA4: J1.7 P1.H20 U2.34 | length 2075.6
  Top Layer w7: v4(-205.74,1859.72) -195.72,1859.72 -186.02,1850.02 -127.63,1850.02 -66.62,1789 113.07,1789 v1(114.33,1790.27) J1.7@194.63,1790.27
  Bottom Layer w6.5: P1.H20@-229.98,1872.99 -217.48,1860.49 -204.98,1860.49 v4(-205.74,1859.72)
  Bottom Layer w7: v1(114.33,1790.27) 115.3,1789.3 176.63,1789.3 188.33,1801 418.33,1801 433.33,1816 544.99,1816 571.29,1842.3 1414.75,1842.3 1437.48,1819.57 1598.11,1819.57 1638.22,1859.68 U2.34@1680.14,1859.68
ADCDATA5: J1.8 P1.H19 U2.33 | length 2141.3
  Top Layer w7: v4(-204.98,1835.49) -131.49,1835.49 -51,1755 v1(18,1755) ; J1.8@324.55,1790.27 452.67,1790.27 v1(453.63,1789.3)
  Bottom Layer w6.5: P1.H19@-229.98,1822.99 -217.48,1835.49 v4(-204.98,1835.49)
  Bottom Layer w7: v1(18,1755) 37,1774 77.55,1774 88.55,1763 210,1763 235,1788 452.33,1788 v1(453.63,1789.3) 474.7,1789.3 488.4,1803 550.37,1803 576.67,1829.3 1409.36,1829.3 1432.09,1806.57 1603.49,1806.57 1636.92,1839.99 U2.33@1680.14,1839.99
ADCDATA6: J1.9 P1.C14 U2.32 | length 2677.8
  Top Layer w7: v4(-504.98,1585.49) -522,1585.49 -543,1606.49 -543,1667.03 -520.28,1689.75 -472.93,1689.75 -443.18,1660 -400.03,1660 -261.79,1798.24 -144.21,1798.24 -64.97,1719 40,1719 v1(65,1744) 65,1749.58 66.32,1750.9 J1.9@194.63,1750.9
  Bottom Layer w6.5: v4(-504.98,1585.49) -492.48,1585.49 P1.C14@-479.98,1572.99
  Bottom Layer w7: v1(65,1744) 65,1749.58 65.55,1750.13 65.68,1750 215.38,1750 238.28,1772.9 426.03,1772.9 432.63,1766.3 476.7,1766.3 500.4,1790 555.76,1790 582.06,1816.3 1403.98,1816.3 1426.71,1793.57 1608.88,1793.57 1635.62,1820.31 U2.32@1680.14,1820.31
ADCDATA7: J1.10 P1.C15 U2.31 | length 2568.4
  Top Layer w6.5: v4(-504.98,1610.49) -516.49,1610.49 -528,1622 -528,1664 -515,1677 -478.21,1677 -447.21,1646 -396,1646 -256.51,1785.49 -149.49,1785.49 -57,1693 v1(66.55,1693)
  Top Layer w7: J1.10@324.55,1750.9 v1(404.85,1750.9)
  Bottom Layer w6.5: v4(-504.98,1610.49) -492.48,1610.49 P1.C15@-479.98,1622.99
  Bottom Layer w7: v1@62.62,1696.93 102.7,1737 220.77,1737 227.77,1744 397.95,1744 v1(404.85,1750.9) 406.45,1752.3 487.85,1752.3 512.55,1777 561.14,1777 587.44,1803.3 1398.59,1803.3 1421.32,1780.57 1614.26,1780.57 1634.32,1800.62 U2.31@1680.14,1800.62
ADCDATA8: J1.11 P1.H17 U2.30 | length 2098.2
  Top Layer w7: v4(-204.98,1710.49) -143.49,1710.49 -93.49,1660.49 85.49,1660.49 114.33,1689.33 v1(114.33,1711.53) J1.11@194.63,1711.53
  Bottom Layer w6.5: P1.H17@-229.98,1722.99 -217.48,1710.49 v4(-204.98,1710.49)
  Bottom Layer w7: v1(114.33,1711.53) 114.57,1711.3 213.45,1711.3 227.45,1725.3 423.63,1725.3 436.63,1738.3 493.7,1738.3 519.4,1764 566.53,1764 592.83,1790.3 1393.21,1790.3 1415.94,1767.57 1625.25,1767.57 1638.62,1780.94 U2.30@1680.14,1780.94
ADCDATA9: J1.12 P1.H16 U2.29 | length 2140
  Top Layer w7: v4(-204.98,1685.49) -140.98,1685.49 -86.49,1631 v1(19,1631) ; J1.12@324.55,1711.53 452.87,1711.53 v1(453.63,1712.3)
  Bottom Layer w6.5: P1.H16@-229.98,1672.99 -217.48,1685.49 v4(-204.98,1685.49)
  Bottom Layer w7: v1(19,1631) 50.68,1631 94.68,1675 319,1675 356.3,1712.3 v1(453.63,1712.3) 497.22,1712.3 535.92,1751 571.91,1751 598.21,1777.3 1387.82,1777.3 1410.55,1754.57 1630.64,1754.57 1637.32,1761.25 U2.29@1680.14,1761.25
ADCDATA10: J1.13 P1.G16 U2.28 | length 2166.3
  Top Layer w7: v4(-254.98,1660.49) -163.1,1660.49 -101.1,1598.49 39.62,1598.49 87.13,1646 v1(114,1646) 140.17,1672.17 J1.13@194.63,1672.17
  Bottom Layer w6.5: P1.G16@-279.98,1672.99 -267.48,1660.49 v4(-254.98,1660.49)
  Bottom Layer w7: v1(114,1646) 336,1646 386.3,1696.3 422.63,1696.3 429.63,1689.3 496.22,1689.3 544.92,1738 577.3,1738 603.6,1764.3 1382.44,1764.3 1405.17,1741.57 U2.28@1680.14,1741.57
ADCDATA11: J1.14 P1.G15 U2.27 | length 2147.2
  Top Layer w7: v4(-254.98,1635.49) -156.49,1635.49 -106.49,1585.49 45,1585.49 60.51,1601 v1(114,1601) ; J1.14@324.55,1672.17 v1(404.85,1672.17)
  Bottom Layer w6.5: P1.G15@-279.98,1622.99 -267.48,1635.49 v4(-254.98,1635.49)
  Bottom Layer w7: v1(114,1601) 333.68,1601 v1(404.85,1672.17) 502.16,1672.17 555,1725 582.68,1725 608.98,1751.3 1292.19,1751.3 1318.49,1725 1648,1725 1651.12,1721.88 U2.27@1680.14,1721.88
AGND: C1.1 C2.1 C3.1 C4.1 C5.2 C6.2 C7.1 C8.1 C10.1 C11.1 C12.1 C13.1 C14.1 C15.2 C16.2 C17.1 C18.1 C23.1 C24.1 C25A.2 C25B.2 C25C.2 C25D.2 C29.1 C30.1 C31A.2 C31B.2 C31C.2 C31D.2 C33.1 C35.1 C36.1 C37.1 C41.1 C44.1 C45.1 C47.1 C48A.2 C48B.2 C48C.2 C48D.2 C60A.1 C60B.1 C60C.1 C60D.1 C61A.1 C61B.1 C61C.1 C61D.1 C62A.1 C62B.1 C62C.1 C62D.1 C63A.1 C63B.1 C63C.1 C63D.1 C64A.1 C64B.1 C64C.1 C64D.1 C65A.1 C65B.1 C65C.1 C65D.1 C67A.1 C67B.1 C67C.1 C67D.1 C69A.2 C69B.2 C69C.2 C69D.2 C70A.2 C70B.2 C70C.2 C70D.2 C71A.1 C71B.1 C71C.1 C71D.1 C72A.2 C72B.2 C72C.2 C72D.2 C75A.1 C75B.1 C75C.1 C75D.1 C78A.2 C78B.2 C78C.2 C78D.2 C80A.2 C80B.2 C80C.2 C80D.2 C81A.2 C81B.2 C81C.2 C81D.2 C83A.2 C83B.2 C83C.2 C83D.2 C84A.2 C84B.2 C84C.2 C84D.2 C85A.2 C85B.2 C85C.2 C85D.2 C86A.2 C86B.2 C86C.2 C86D.2 C87A.2 C87B.2 C87C.2 C87D.2 C90AF.1 C90DF.1 C91AF.1 C91DF.1 C92AF.1 C92DF.1 C95.2 C98.2 C101.1 C102.1 C106.2 C110.2 C111.2 C113AF.1 C113DF.1 C126AF.1 C126DF.1 C128AF.1 C128DF.1 C129AF.2 C129DF.2 J6.1 J6.2 J6.3 J6.4 J6.5 J6.6 J6.7 J6.8 J6.9 J6.10 J6.11 J6.12 J6.13 J6.14 J6.15 J6.16 J6.17 J6.18 J6.19 J6.20 J6.21 J6.22 J6.23 J8.1 L9A.2 L9B.2 L9C.2 L9D.2 L14.1 R14.1 R18.1 R25A.1 R25B.1 R25C.1 R25D.1 R28.2 R40.2 R42.2 R48.2 R49A.2 R49B.2 R49C.2 R49D.2 R52A.2 R52B.2 R52C.2 R52D.2 R53A.1 R53B.1 R53C.1 R53D.1 R54A.2 R54B.2 R54C.2 R54D.2 R80.2 R88A.2 R88B.2 R88C.2 R88D.2 R90A.2 R90B.2 R90C.2 R90D.2 R92A.2 R92B.2 R92C.2 R92D.2 R95AF.2 R95DF.2 R97AF.2 R97DF.2 U1.3 U2.1 U2.3 U2.5 U2.8 U2.10 U2.12 U2.14 U2.16 U2.47 U5A.5 U5A.28 U5B.5 U5B.28 U5C.5 U5C.28 U5D.5 U5D.28 U7A.4 U7B.4 U7C.4 U7D.4 U8A.8 U8B.8 U8C.8 U8D.8 U9AF.8 U9DF.8 U12.4 U13.5 U14.4 U20AF.6 U20DF.6 | length 20216.2
  Top Layer w7: U13.5@1730.24,2431.47 1734.62,2431.47 R40.2@1806.44,2503.29 ; R42.2@1743.88,1009.61 1743.88,977.31 v2(1746.02,975.16) ; v2(1755.11,3050.39) 1756.56,3051.84 R28.2@1788.91,3051.84 ; C7.1@2035.22,2014 C8.1@2103.22,2014 ; C10.1@2268.18,1806.76 2270,1804.94 v2(2270,1771) ; C48B.2@2287,2456 2325,2418 U7B.4@2379,2418 ; C48A.2@2287,3052 2325,3014 U7A.4@2379,3014 ; C48D.2@2288,659 2326,621 U7D.4@2380,621 ; C48C.2@2288,1257 2326,1219 U7C.4@2380,1219 ; C24.1@3647,2015 C23.1@3714,2015 v2(3750,2015) ; C30.1@3651,1681 3749,1681 v2(3750,1680)
  Top Layer w10: R14.1@1852.59,2116.78 1852.59,2122.59 v2(1885,2155) ; C95.2@1912.04,627.13 1912.17,627 v2(1945,627) ; C90DF.1@1925.66,941.55 1955,912.21 v2(1955,891) ; R95DF.2@1963,1418 1963,1431.83 v2(1985,1453.83) ; C92DF.1@2017.66,965.67 2026.66,974.67 C91DF.1@2079.95,974.67 ; v2(2045,2859) 2064,2840 R95AF.2@2078,2840 ; U1.3@2162.4,1797.78 2162.4,1770.6 2189.4,1743.6 R18.1@2189.4,1731
  Top Layer w15: J6.12@1438,436.5 v1(1438,562) ; J6.13@1439,934.5 v1(1439,1060) ; J6.16@1439,2507 v1(1439,2562) ; J6.14@1440,1433.5 v1(1440,1559) ; J6.17@1441,3009 v1(1441,3064) ; J6.15@1443,2002 v1(1443,2249) ; v1(1606,3283) J6.18@1606,3338 ; J6.11@1851,252 v1(1851,321) ; v1(2103,3285) J6.19@2103,3340 ; J6.10@2274,260 v1(2274,321) ; v1@2343,2355 2343,2338.12 C78B.2@2374,2307.12 ; v1@2343,2951 2343,2934.12 C78A.2@2374,2903.12 ; v1@2344,558 2344,541.12 C78D.2@2375,510.12 ; v1@2344,1156 2344,1139.12 C78C.2@2375,1108.12 ; U7B.4@2379,2418 2379,2308.12 2432.12,2255 2543,2255 2543,2302 ; U7A.4@2379,3014 2379,2904.12 2432.12,2851 2543,2851 2543,2898 ; U7D.4@2380,621 2380,511.12 2433.12,458 2544,458 2544,505 ; U7C.4@2380,1219 2380,1109.12 2433.12,1056 2544,1056 2544,1103 ; R52B.2@2536,2347 2543,2340 2543,2302 ; R52A.2@2536,2943 2543,2936 2543,2898 ; R52D.2@2537,550 2544,543 2544,505 ; R52C.2@2537,1148 2544,1141 2544,1103 ; v1(2562,2303) 2544,2303 2543,2302 ; v1(2562,2899) 2544,2899 2543,2898 ; v1(2563,506) 2545,506 2544,505 ; v1(2563,1104) 2545,1104 2544,1103 ; J6.20@2659,3349 v1@2916,3349 ; R53B.1@2742,2426 R53B.1@2741,2425 2741,2490 R54B.2@2744,2493 ; R53A.1@2742,3022 R53A.1@2741,3021 2741,3086 R54A.2@2744,3089 ; R53D.1@2743,629 R53D.1@2742,628 2742,693 R54D.2@2745,696 ; R53C.1@2743,1227 R53C.1@2742,1226 2742,1291 R54C.2@2745,1294 ; v1(2784,2449) 2744,2489 R54B.2@2744,2493 ; v1(2784,3045) 2744,3085 R54A.2@2744,3089 ; v1(2785,652) 2745,692 R54D.2@2745,696 ; v1(2785,1250) 2745,1290 R54C.2@2745,1294 ; C86B.2@2795,2287 2829,2253 2891,2253 C87B.2@2925,2287 2936,2298 v1(2936,2323) ; C86A.2@2795,2883 2829,2849 2891,2849 C87A.2@2925,2883 2936,2894 v1(2936,2919) ; C86D.2@2796,490 2830,456 2892,456 C87D.2@2926,490 2937,501 v1(2937,526) ; C86C.2@2796,1088 2830,1054 2892,1054 C87C.2@2926,1088 2937,1099 v1(2937,1124) ; J6.9@2860.5,257 v1(2986,257) ; v1@2885.12,2457.88 2875,2468 C63B.1@2875,2493 C62B.1@2810,2493 R54B.2@2744,2493 ; v1@2885.12,3053.88 2875,3064 C63A.1@2875,3089 C62A.1@2810,3089 R54A.2@2744,3089 ; v1@2886.12,660.88 2876,671 C63D.1@2876,696 C62D.1@2811,696 R54D.2@2745,696 ; v1@2886.12,1258.88 2876,1269 C63C.1@2876,1294 C62C.1@2811,1294 R54C.2@2745,1294 ; C60B.1@2985,2469.88 C60B.1@2973,2457.88 C61B.1@3093,2457.88 C61B.1@3103,2467.88 ; C60A.1@2985,3065.88 C60A.1@2973,3053.88 C61A.1@3093,3053.88 C61A.1@3103,3063.88 ; C60D.1@2986,672.88 C60D.1@2974,660.88 C61D.1@3094,660.88 C61D.1@3104,670.88 ; C60C.1@2986,1270.88 C60C.1@2974,1258.88 C61C.1@3094,1258.88 C61C.1@3104,1268.88 ; C84B.2@3084,2294 C80B.2@3084,2359 3084,2391 v1(3090,2397) ; C84A.2@3084,2890 C80A.2@3084,2955 3084,2987 v1(3090,2993) ; C84D.2@3085,497 C80D.2@3085,562 3085,594 v1(3091,600) ; C84C.2@3085,1095 C80C.2@3085,1160 3085,1192 v1(3091,1198) ; v1(3103,2507) C61B.1@3103,2467.88 ; v1(3103,3103) C61A.1@3103,3063.88 ; v1(3104,710) C61D.1@3104,670.88 ; v1(3104,1308) C61C.1@3104,1268.88 ; J6.21@3106.63,3346.5 v1(3232.13,3346.5) v1@3231.63,3347 ; C61B.1@3116.24,2481.12 C61B.1@3103,2467.88 ; C61A.1@3116.24,3077.12 C61A.1@3103,3063.88 ; C61D.1@3117.24,684.12 C61D.1@3104,670.88 ; C61C.1@3117.24,1282.12 C61C.1@3104,1268.88 ; v1(3188,2444) 3187,2445 C64B.1@3187,2481.12 3258.88,2481.12 C65B.1@3259,2481 v1(3299,2481) 3299,2428 3318,2409 L9B.2@3359,2409 3407,2409 v1(3410,2406) ; v1(3188,3040) 3187,3041 C64A.1@3187,3077.12 3258.88,3077.12 C65A.1@3259,3077 v1(3299,3077) 3299,3024 3318,3005 L9A.2@3359,3005 3407,3005 v1(3410,3002) ; v1(3189,647) 3188,648 C64D.1@3188,684.12 3259.88,684.12 C65D.1@3260,684 v1(3300,684) 3300,631 3319,612 L9D.2@3360,612 3408,612 v1(3411,609) ; v1(3189,1245) 3188,1246 C64C.1@3188,1282.12 3259.88,1282.12 C65C.1@3260,1282 v1(3300,1282) 3300,1229 3319,1210 L9C.2@3360,1210 3408,1210 v1(3411,1207) ; J6.8@3356.63,259.5 v1(3482.13,259.5) v1@3481.63,260 ; J6.22@3606.63,3346.5 v1(3732.13,3346.5) v1@3731.63,3347 ; J6.7@3856.63,259.5 v1(3982.13,259.5) v1@3981.63,260 ; J6.23@4106.63,3346.5 v1(4232.13,3346.5) v1@4231.63,3347 ; J6.4@4274,1429.5 v1(4274,1555) ; v1(4274.63,553) 4275.13,553.5 J6.6@4275.13,428 ; v1@4274.63,1053 v1(4275.13,1053.5) J6.5@4275.13,928 ; v1@4274.63,3053 v1(4275.13,3053.5) J6.1@4275.13,2928 ; J6.3@4276,1935.5 v1(4276,2061) ; J6.2@4278,2433.5 v1(4278,2559)
  Top Layer w20: R80.2@1170,89.47 v2(1170,130) ; C90AF.1@1599.88,2879 1599.88,2835.12 C92AF.1@1648,2787 C91AF.1@1648,2721 1648,2699 1688,2659 R97AF.2@1785,2659 ; U20DF.6@1925,1295 1927,1293 v2(1983,1293) ; C90DF.1@1925.66,941.55 1949.77,965.67 C92DF.1@2017.66,965.67 ; v1(1940,2787) 1955,2802 U20AF.6@1955,2878 ; v2(1950,1859.68) 1993.44,1859.68 C33.1@1999.12,1854 ; v2(1952,1722) 1983.12,1722 C44.1@1999.12,1738 ; v5@2136.08,3195.88 v5(2140.43,3191.53) ; R97DF.2@2146,1123 2173,1123 2200,1096 2256,1096 v2(2290,1130) ; C17.1@2162,1596 2186,1596 v2(2195,1605) 2195,1645 ; J8.1@3573.75,102 v5(3668,102)
  Top Layer w40: C111.2@1549.25,838.2 1549.67,837.78 v5(1612.4,837.78) ; v5(1581.27,1090.54) 1581.27,1139.38 ; C101.1@1582.67,2428.58 C101.1@1582.67,2443.59 v5(1664.14,2443.59) U13.5@1751.06,2443.59 ; v5(1605.92,3144.31) 1617.61,3156 C98.2@1617.61,3206.92 ; C106.2@1621.12,1301.98 v5@1659,1301.98 ; v5(1875.32,3199.58) 1889.27,3213.54 1920.94,3213.54 ; C102.1@2062.1,2272.57 v5(2062.1,2320.87) ; C110.2@2077.01,3195.88 v5@2136.08,3195.88
  Bottom Layer w7: U2.47@1928.17,1950.23 1928.17,1909.83 1938.95,1899.05 1955.05,1899.05 ; C31B.2@2337,2430 2359.12,2407.88 C25B.2@2440,2407.88 ; C31A.2@2337,3026 2359.12,3003.88 C25A.2@2440,3003.88 ; C31D.2@2338,633 2360.12,610.88 C25D.2@2441,610.88 ; C31C.2@2338,1231 2360.12,1208.88 C25C.2@2441,1208.88
  Bottom Layer w10: v2(1543.61,2818) U9AF.8@1573,2818 ; R48.2@1862,1397 1928.17,1397 v2(1985,1453.83) 1956.41,1482.41 C35.1@1939.78,1482.41 C45.1@1870.78,1482.41 ; U2.16@1888.8,1631.33 1888.8,1672.8 1898,1682 1916.17,1682 ; U2.14@1929.59,1629.91 U2.14@1928.17,1631.33 1928.17,1670 1916.17,1682 ; C37.1@1952.59,2032.78 1953.59,2033.78 C41.1@1953.59,2101.78 ; v2(1955,891) 1969,905 U9DF.8@1985,905 ; U2.1@1976,1900 1978,1902 v2(1978,1926) ; U2.12@1999.04,1682.51 1959.49,1682.51 ; U2.10@1999.04,1721.88 v2@1950.23,1721.88 ; U2.8@1999.04,1761.25 1962.25,1761.25 1950.23,1749.23 v2@1950.23,1721.88 ; U2.5@1999.04,1820.31 1953.69,1820.31 1950,1824 v2(1950,1859.68) ; U2.3@1999.04,1859.68 v2(1950,1859.68) ; U2.1@1999.04,1899.05 1955.05,1899.05 1950,1894 v2(1950,1859.68) ; 2184.62,1773 2185.22,1772.4 ; v1(2301,2274) 2341,2274 U8B.8@2343,2272 ; v1(2301,2870) 2341,2870 U8A.8@2343,2868 ; v1(2302,477) 2342,477 U8D.8@2344,475 ; v1(2302,1075) 2342,1075 U8C.8@2344,1073 ; 1916.17,1682 1916.68,1682.51 1959.49,1682.51 ; v2@1950.23,1721.88 1950.23,1691.77 1959.49,1682.51
  Bottom Layer w15: R92D.2@2062.32,378.78 2062.32,345.33 v2(2062.66,345) ; v2(2080,2155) 2100,2135 R92B.2@2115,2135 ; v2(2110,2735) R92A.2@2110,2775 ; v2(2115,905) 2130,920 R92C.2@2130,935 ; R90D.2@2192.32,380 2223.78,380 v2(2225,378.78) ; R88D.2@2192.32,515 2215,515 v2(2225,505) ; R90A.2@2240,2780 v2(2275,2780) ; R88A.2@2240,2970 2245,2965 v2(2275,2965) ; R90B.2@2245,2135 2259,2135 v2(2275,2151) ; R88B.2@2245,2330 v2(2275,2330) ; R90C.2@2258,935 2262,939 v2(2290,939) ; R88C.2@2258,1130 v2(2290,1130) ; U5B.5@3059,2217.88 3059,2169 v1(3073,2155) ; U5A.5@3059,2813.88 3059,2765 v1@3073,2751 ; U5D.5@3060,420.88 3060,372 v1(3074,358) ; U5C.5@3060,1018.88 3060,970 v1(3074,956) ; U5B.28@3259,2578.12 3259,2521 v1(3299,2481) ; U5A.28@3259,3174.12 3259,3117 v1(3299,3077) ; U5D.28@3260,781.12 3260,724 v1(3300,684) ; U5C.28@3260,1379.12 3260,1322 v1(3300,1282) ; v1(3410,2406) 3442,2406 ; v1(3410,3002) 3442,3002 ; v1(3411,609) 3443,609 ; v1(3411,1207) 3443,1207 ; C75B.1@3444,2371 3442,2373 3442,2406 ; R25B.1@3444,2437 3442,2435 3442,2406 ; C75A.1@3444,2967 3442,2969 3442,3002 ; R25A.1@3444,3033 3442,3031 3442,3002 ; C75D.1@3445,574 3443,576 3443,609 ; R25D.1@3445,640 3443,638 3443,609 ; C75C.1@3445,1172 3443,1174 3443,1207 ; R25C.1@3445,1238 3443,1236 3443,1207 ; v1(3666,2506) 3666,2538 R49B.2@3669,2541 ; v1(3666,3102) 3666,3134 R49A.2@3669,3137 ; v1(3667,709) 3667,741 R49D.2@3670,744 ; v1(3667,1307) 3667,1339 R49C.2@3670,1342 ; C81B.2@3770,2147 3779.88,2156.88 C71B.1@3779.88,2311 3779.88,2313.88 v1(3836,2370) 3836,2373.88 C67B.1@3890.12,2428 ; C81D.2@3771,350 3780.88,359.88 C71D.1@3780.88,514 3780.88,516.88 v1(3837,573) 3837,576.88 C67D.1@3891.12,631 ; C81C.2@3771,948 3780.88,957.88 C71C.1@3780.88,1112 3780.88,1114.88 v1(3837,1171) 3837,1174.88 C67C.1@3891.12,1229 ; 3779.88,2752.88 C71A.1@3779.88,2883.88 ; C71A.1@3779.88,2907 3779.88,2909.88 v1(3836,2966) 3836,2969.88 C67A.1@3890.12,3024 ; C67B.1@3870,2455 C70B.2@3870,2588.28 ; C67A.1@3870,3051 C70A.2@3870,3184.28 ; C67D.1@3871,658 C70D.2@3871,791.28 ; C67C.1@3871,1256 C70C.2@3871,1389.28 ; v1@4271,1053 4274.63,1053 4274.63,1053.63 v1@4275,1054 ; v1(4274.63,553) v1@4278,556.37 ; v1@4275.32,1053.68 v1@4278,1051
  Bottom Layer w20: C113AF.1@1837,2803 C126AF.1@1903,2803 1919,2787 v1(1940,2787) 1965,2787 C129AF.2@1977,2799 C128AF.1@2043,2799 2086,2799 R92A.2@2110,2775 ; C113DF.1@1973,1179 C126DF.1@1973,1244 1973,1283 v2(1983,1293) 1998,1308 C129DF.2@1998,1332 C128DF.1@1998,1400 ; v2@2157,1773 2184.62,1773 ; C36.1@2185.22,1738.4 2185.22,1772.4 C47.1@2185.22,1806.4 ; C25B.2@2440,2407.88 2452.12,2420 v1(2516,2420) ; C25A.2@2440,3003.88 2452.12,3016 v1(2516,3016) ; C25D.2@2441,610.88 2453.12,623 v1(2517,623) ; C25C.2@2441,1208.88 2453.12,1221 v1(2517,1221) ; C16.2@3417,1591 C14.1@3483,1591 3531.88,1591 C12.1@3549.88,1573 ; C6.2@3417,2020 C3.1@3483,2020 3483,1990 3512,1961 3627,1961 3670.12,2004.12 C1.1@3670.12,2033 3691,2012.12 v2(3691,1965) ; C5.2@3418,1698 C4.1@3481,1698 3481,1673 3508,1646 3616,1646 3660.12,1690.12 C2.1@3660.12,1718 3680.12,1698 v2(3680.12,1648) ; C15.2@3418,1897 C13.1@3483,1897 3545.88,1897 C11.1@3559.88,1883 3573.88,1897 v2(3611,1897) ; C12.1@3551.88,1569 3560.88,1578 3603,1578 v2(3604,1579) ; v1(3688,2196) C71B.1@3779.88,2287.88 ; v1(3688,2792) 3779.88,2883.88 C71A.1@3779.88,2907 ; v1(3689,399) C71D.1@3780.88,490.88 ; v1(3689,997) C71C.1@3780.88,1088.88 ; v1(4275.13,1053.5) 4307,1021.63 L14.1@4307,958
  other v1: 2344,562 2886,661 2344,1160 2886,1259 2343,2359 2885,2458 1675,2672 3075,2749 2343,2955 2885,3054 2916,3350
  other v2: 2049.3,973 3553,1646 2163,1773 3566,1960 2069.22,2014 1953.59,2067.78
  other v5: 1537,976 1659,1301 1815,3146 1779,3260 1926,3264
AMPBOTSUPA: C67A.2 C69A.1 C70A.1 R49A.1 R50A.1 U6A.4 | length 461.6
  Top Layer w15: v1(3729,3041) 3729,3101 U6A.4@3730,3102
  Bottom Layer w15: R50A.1@3728,3207 3729,3206 3729,3173 ; v1(3729,3041) 3762.88,3041 C67A.2@3779.88,3024 ; R49A.1@3729,3137 3729,3173 ; C67A.2@3783,3020.88 C67A.2@3779.88,3024 ; C70A.1@3802,3185.4 C69A.1@3802,3115.4 ; 3729,3173 3744.4,3173 C69A.1@3802,3115.4 ; C67A.2@3779.88,3024 3802,3046.12 C69A.1@3802,3115.4
AMPBOTSUPB: C67B.2 C69B.1 C70B.1 R49B.1 R50B.1 U6B.4 | length 461.6
  Top Layer w15: v1(3729,2445) 3729,2505 U6B.4@3730,2506
  Bottom Layer w15: R50B.1@3728,2611 3729,2610 3729,2577 ; v1(3729,2445) 3762.88,2445 C67B.2@3779.88,2428 ; R49B.1@3729,2541 3729,2577 ; C67B.2@3783,2424.88 C67B.2@3779.88,2428 ; C70B.1@3802,2589.4 C69B.1@3802,2519.4 ; 3729,2577 3744.4,2577 C69B.1@3802,2519.4 ; C67B.2@3779.88,2428 3802,2450.12 C69B.1@3802,2519.4